# Altium PCB PCB1.PcbDoc
Units mm, origin at the board's own origin, x right, y up, seen from the top; angles counter-clockwise.
Board outline 127 x 101.6 mm, 3 copper layers (Top Layer, Internal Plane 1, Bottom Layer), stack 0.427 mm thick; 32 components, 32 nets, 124 pads, 9 vias.
Unrouted connection lines stored in the file: 86.
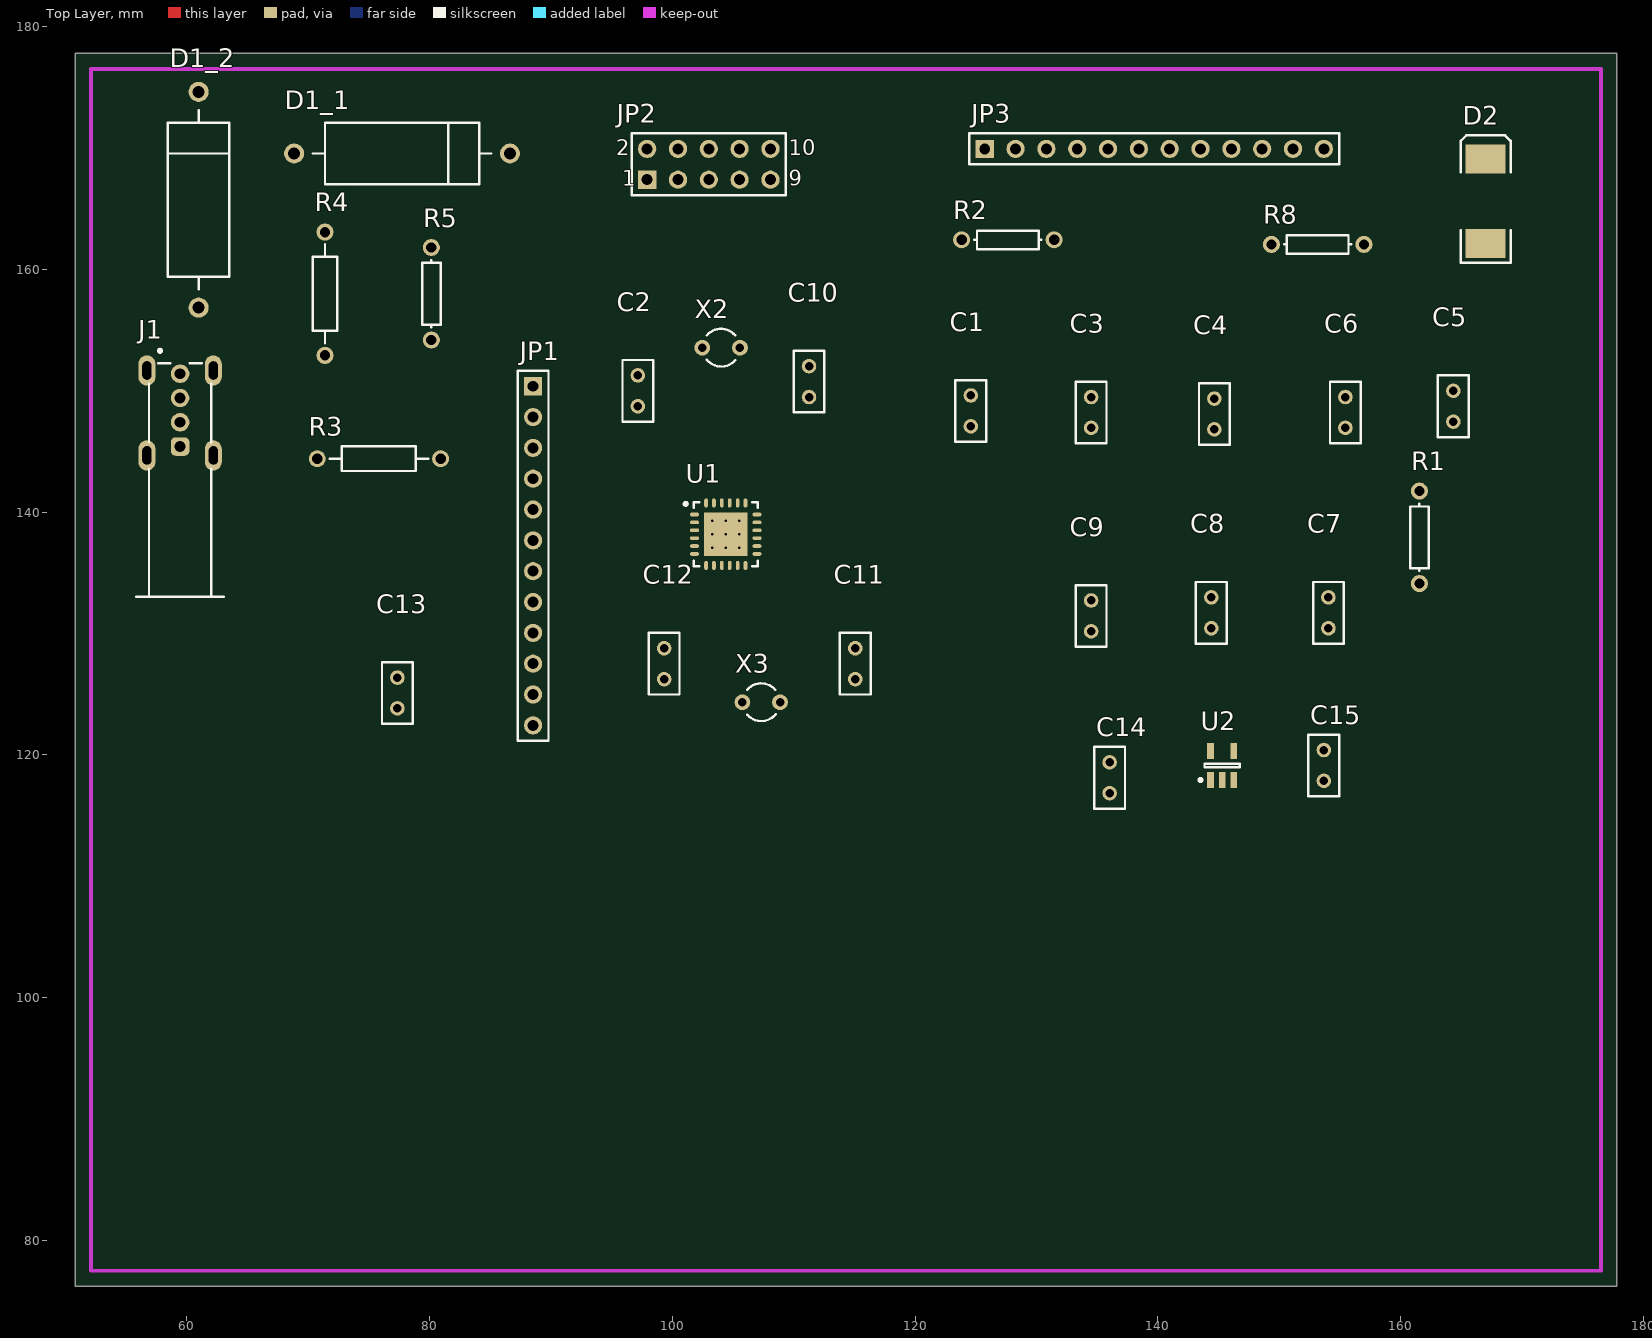
[diagram p0: Top Layer view]
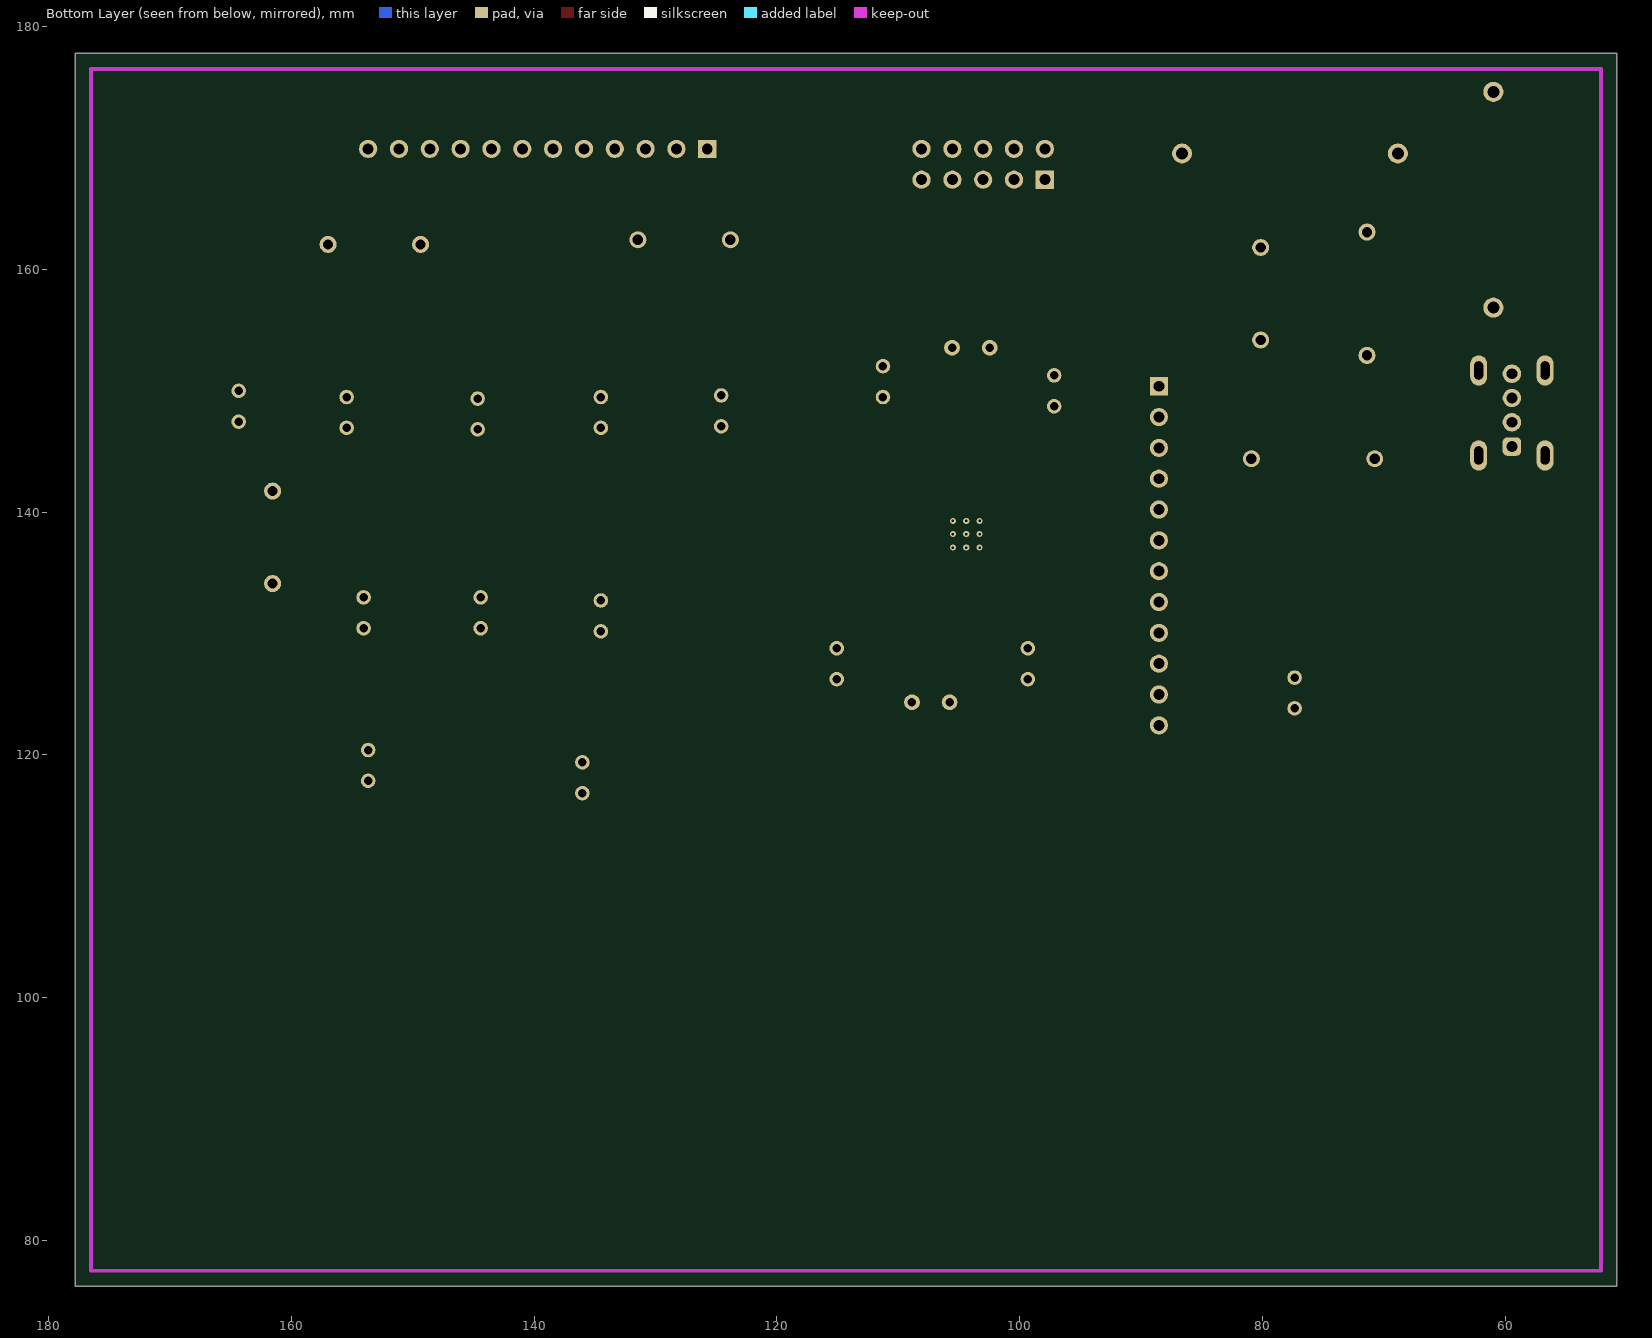
[diagram p1: Bottom Layer view, seen from below]
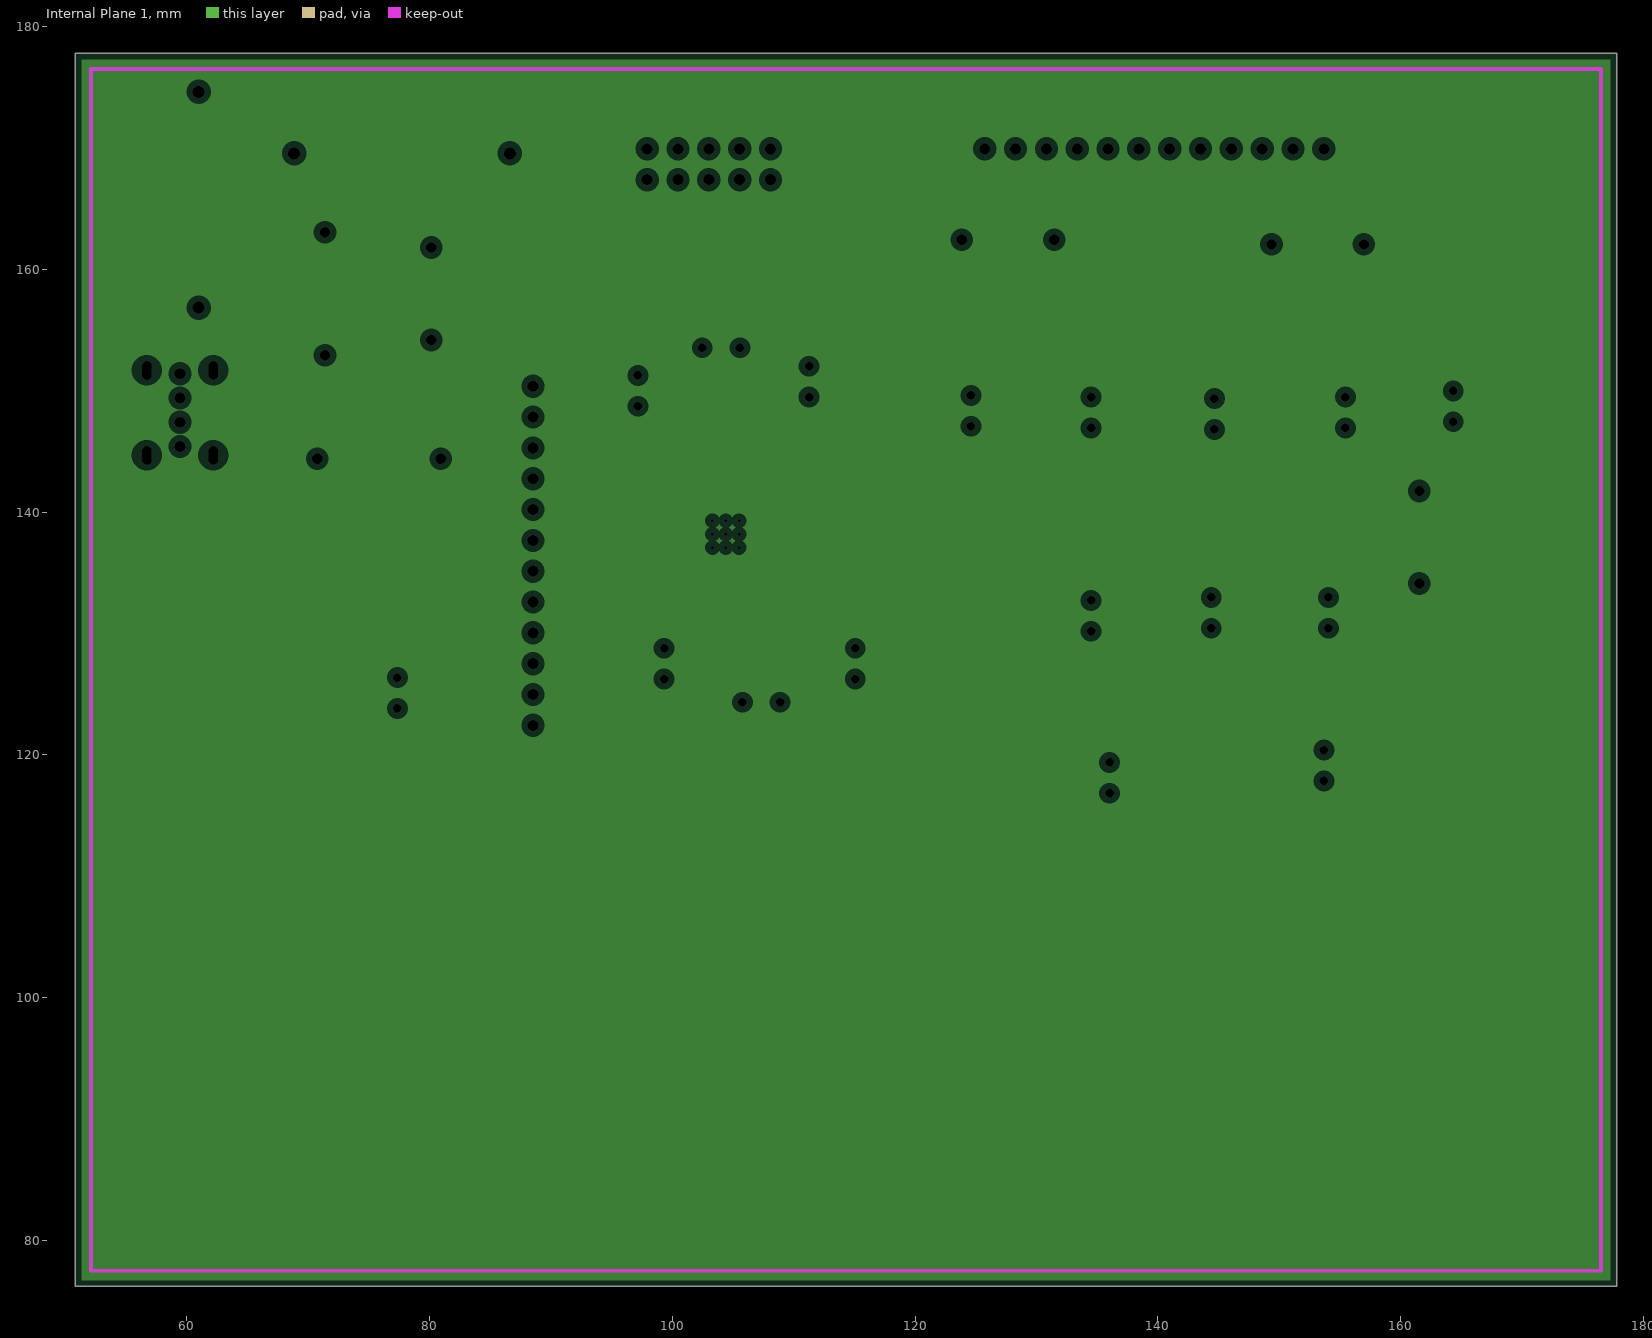
[diagram p2: Internal Plane 1, clearances drawn from the general rule]

## Layer stack, top to bottom
Top Solder: solder mask 0.0102, Solder Resist, Dk 3.5
Top Layer: signal copper 0.0356
Internal Plane 1: plane copper 0.0356
Dielectric 1: dielectric 0.32, FR-4, Dk 4.8
Bottom Layer: signal copper 0.0356
Bottom Solder: solder mask 0.0102, Solder Resist, Dk 3.5

## Board outline
50.8,76.2 177.8,76.2 177.8,177.8 50.8,177.8

## Design rules (kind name [scope] priority, off if disabled: settings)
Clearance [All] p1: gap=0.3
PlaneClearance [All] p1: clearance=0.508
PlaneConnect [All] p1: planeconnectstyle=Relief reliefexpansion=0.508 reliefentries=4 reliefconductorwidth=0.254 reliefairgap=0.254
PolygonConnect [All] p1: connectstyle=Relief reliefconductorwidth=0.254 reliefentries=4 polygonreliefangle="90 Angle" airgapwidth=0.254
RoutingVias [All] p1: holewidth=0.8 width=1.6 viastyle="Through Hole" minholewidth=0.711 minwidth=1.27 maxholewidth=0.711 maxwidth=1.27
SolderMaskExpansion [All] p1: expansion=0.102
UnpouredPolygon [All] p1: allowunpoured=FALSE
Width [All] p1: maxlimit=0.3 minlimit=0.3 preferedwidth=0.3
27 further rules are at their usual default settings.

## Components (designator, comment, footprint, x,y, rotation, side; value= is the part's Value field where it differs from the comment)
C1 "Cap" RAD-0.1 124.587,148.336 r90 top
C2 "Cap" RAD-0.1 97.155,149.987 r90 top
C3 "Cap" RAD-0.1 134.493,148.209 r90 top
C4 "Cap" RAD-0.1 144.653,148.082 r90 top
C5 "Cap" RAD-0.1 164.338,148.717 r90 top
C6 "Cap" RAD-0.1 155.448,148.209 r90 top
C7 "Cap" RAD-0.1 154.051,131.699 r90 top
C8 "Cap" RAD-0.1 144.399,131.699 r90 top
C9 "Cap" RAD-0.1 134.493,131.445 r90 top
C10 "Cap" RAD-0.1 111.252,150.749 r90 top
C11 "Cap" RAD-0.1 115.062,127.508 r270 top
C12 "Cap" RAD-0.1 99.314,127.508 r270 top
C13 "Cap" RAD-0.1 77.343,125.095 r90 top
C14 "Cap" RAD-0.1 136.017,118.11 r90 top
C15 "Cap" RAD-0.1 153.67,119.126 r90 top
D1_1 "D Zener" DIODE-0.7 77.724,169.545 r0 top
D1_2 "D Zener" DIODE-0.7 60.96,165.735 r90 top
D2 "Diode" SMC 167.005,165.608 r90 top
J1 "48204-0001" MOLX-48204-0001_V 59.436,137.668 r0 top
JP1 "Header 12" HDR1X12 88.519,150.368 r270 top
JP2 "Header 5X2" HDR2X5 97.917,167.386 r0 top
JP3 "Header 12" HDR1X12 125.73,169.926 r0 top
R1 "Res1 10K" AXIAL-0.3 161.544,137.922 r90 top
R2 "Res1" AXIAL-0.3 127.635,162.433 r0 top
R3 "USB SPEC" AXIAL-0.4 75.819,144.399 r0 top
R4 "USB SPEC" AXIAL-0.4 71.374,157.988 r90 top
R5 "1.5K" AXIAL-0.3 80.137,157.988 r90 top
R8 "390" AXIAL-0.3 153.162,162.052 r0 top
U1 "EFM32ZG108F16-QFN24" ENMR-QFN24_M 104.394,138.176 r0 top
U2 "LT1761ES5-3.3#TRMPBF" LT-S5-5-TSOT-23_N 145.288,119.126 r90 top
X2 "XTAL" R38 104.013,153.543 r270 top
X3 "XTAL" R38 107.315,124.333 r90 top

## Footprints (in the part's own frame and the unit in brackets; to place one, negate y for a bottom-side part, rotate by r counter-clockwise, add the part's x,y. Pads: shape width x height; smd on the part's side, far side on the other; paste and mask are expansions set on the pad)
AXIAL-0.3 [mm] "Axial Device, Thru-Hole; 2 Leads; 0.3 in Pin Spacing"
  round 1.4 hole 0.85: 1(-3.81,0) 2(3.81,0)
  silkscreen extent -2.77,-0.76 2.77,0.76
AXIAL-0.4 [mm] "Axial Device, Thru-Hole; 2 Leads; 0.4 in Pin Spacing"
  round 1.4 hole 0.85: 1(-5.08,0) 2(5.08,0)
  silkscreen extent -4.06,-1.02 4.06,1.02
DIODE-0.7 [mm] "Diode, Thru-Hole; 2 Leads; 0.7 in Pin Spacing"
  round 1.65 hole 1: 1(-8.89,0) 2(8.89,0)
  silkscreen extent -7.37,-2.54 7.37,2.54
ENMR-QFN24_M [mm] "QFN, 24-Leads, Body 5x5mm, Pitch 0.65mm, Thermal Pad 3.6 x 3.6mm, IPC Low Density"
  rect 3.6x3.6 smd: 0(0,0)
  oval 0.75x0.3 smd: 1(-2.575,1.625) 2(-2.575,0.975) 3(-2.575,0.325) 4(-2.575,-0.325) 5(-2.575,-0.975) 6(-2.575,-1.625) 13(2.575,-1.625) 14(2.575,-0.975) 15(2.575,-0.325) 16(2.575,0.325) 17(2.575,0.975) 18(2.575,1.625)
  oval 0.3x0.75 smd: 7(-1.625,-2.575) 8(-0.975,-2.575) 9(-0.325,-2.575) 10(0.325,-2.575) 11(0.975,-2.575) 12(1.625,-2.575) 19(1.625,2.575) 20(0.975,2.575) 21(0.325,2.575) 22(-0.325,2.575) 23(-0.975,2.575) 24(-1.625,2.575)
  silkscreen extent -3.42,-2.65 2.65,2.65, body extent -2.5,-2.5 2.5,2.5, height 0.9
HDR1X12 [mm] "Connector; Header; 12 Position"
  rect 1.5x1.5 hole 0.9: 1(0,0)
  round 1.5 hole 0.9: 2(2.54,0) 3(5.08,0) 4(7.62,0) 5(10.16,0) 6(12.7,0) 7(15.24,0) 8(17.78,0) 9(20.32,0) 10(22.86,0) 11(25.4,0) 12(27.94,0)
  silkscreen extent -1.27,-1.27 29.21,1.27
HDR2X5 [mm] "Connector; Header; 5x2 Position"
  rect 1.5x1.5 hole 0.9: 1(0,0)
  round 1.5 hole 0.9: 2(0,2.54) 3(2.54,0) 4(2.54,2.54) 5(5.08,0) 6(5.08,2.54) 7(7.62,0) 8(7.62,2.54) 9(10.16,0) 10(10.16,2.54)
  silkscreen extent -1.27,-1.27 11.43,3.81
LT-S5-5-TSOT-23_N [mm] "SOT23, 5-Leads, Body 2.90x1.63mm, Pitch 0.95mm, IPC Medium Density"
  rect 1.3x0.55 smd: 1(-1.2,0.95) 2(-1.2,0) 3(-1.2,-0.95) 4(1.2,-0.95) 5(1.2,0.95)
  silkscreen extent -1.32,-1.45 0.15,1.9, body extent -0.87,-1.45 0.87,1.45, height 1
MOLX-48204-0001_V [mm] "USB Type-A Up-Right Reverse Connector"
  rrect50% 1.52x1.52 hole 0.9: 1(0,7.73)
  round 1.52 hole 0.9: 2(0,9.73) 3(0,11.73) 4(0,13.73)
  oval 1.4x2.5 hole 0.75 slot 1.5 at 90 deg: MH1(-2.735,7) MH2(2.735,7) MH3(-2.735,14) MH4(2.735,14)
  silkscreen extent -3.6,-4.64 3.6,15.75, body extent -3.61,-4.71 3.59,14.54, height 14.68
R38 [mm] "Crystal, Thru-Hole; 2 Leads; Body 3.1 x 8.2 mm (Dia.xH)"
  round 1.3 hole 0.7: 1(0,1.55) 2(0,-1.55)
  silkscreen extent -1.55,-1.19 1.55,1.17
RAD-0.1 [mm] "Radial Cap, Thru-Hole; 2 Leads; 0.1 in Pin Spacing"
  round 1.2 hole 0.7: 1(-1.27,0) 2(1.27,0)
  silkscreen extent -2.54,-1.27 2.54,1.27
SMC [mm] "DO-214-AB/SMC; 2 C-Bend Leads; Body 7.9 x 5.9 mm, inc. leads (LxW)"
  rect 2.4x3.3 smd: 1(-3.475,0) 2(3.475,0)
  silkscreen extent -5.07,-2.05 5.43,2.05

## Part data
C1 C2 C3 C4 C5 C6 C7 C8 C9 C10 C11 C12 C13 C14 C15: "Capacitor"
D1_1 D1_2: "Zener Diode"
D2: "Default Diode"
J1: library part CMP-0411-00001-1, "USB Shielded I/O Receptacle, Type A"
JP1 JP3: "Header, 12-Pin"
JP2: "Header, 5-Pin, Dual row"
R1 R5 R8: library part Res1, "Resistor"
R2: "Resistor"
R3 R4: library part Res2, "Resistor"
U1: library part CMP-0270-00117-1, "EFM32 Zero Gecko, M0+ ARM Cortex CPU, 16 KB Flash, 4 KB RAM, 1.85 - 3.8 V Supply, 32 MHz Max Speed, -40 to 85 degC, 24-Pin QFN, RoHS Compliant"
U2: library part CMP-0476-01224-1, "100 mA, Low Noise, LDO Micropower Regulator, 1.8 to 20 V Vin, 3.3 V Vout, 5-pin SOT23 (S5-5), -40 to 125 degC, Pb-Free, Mini Tape and Reel"
X2 X3: "Crystal Oscillator"

## Via types
v1: diameter 0.5, hole 0.2, Top Layer to Bottom Layer, 9 vias

## Nets (pads, with @x,y where several pads share a name; then routed paths per layer and width w, separated by ;. In a path a pad name is that pad's centre, name@x,y a point inside that pad or via, vN(x,y) a via of type N, cw(c..) or ccw(c..) an arc to the next point about the centre after c; other vN are vias at no path point)
GND: C1.1 C2.1 C3.1 C4.1 C5.1 C6.1 C7.1 C8.1 C9.1 C10.1 C11.1 C12.1 C13.1 C14.1 C15.1 D1_1.1 D1_2.1 D2.2 J1.4 JP1.11 JP2.3 JP2.5 JP2.9 JP3.2 JP3.12 U1.0 U2.2
  other v1: 103.294,137.076 104.394,137.076 105.494,137.076 103.294,138.176 104.394,138.176 105.494,138.176 103.294,139.276 104.394,139.276 105.494,139.276
NetC2_2: C2.2 X2.2
NetC5_2: C5.2 U1.16
NetC7_2: C7.2 C8.2 C9.2 R1.1 U1.9 U1.12
NetC10_2: C10.2 X2.1
NetC11_2: C11.2 X3.2
NetC12_2: C12.2 X3.1
NetC14_2: C14.2 J1.1 JP3.1 U2.1 U2.3
NetC15_2: C15.2 U2.4
NetD1_1_2: D1_1.2 JP1.4 R3.2 U1.4
NetD1_2_2: D1_2.2 JP1.3 R4.2 R5.1 U1.3
NetD2_1: D2.1 R8.2
NetJ1_2: J1.2 R4.1
NetJ1_3: J1.3 R3.1
NetJP1_2: JP1.2 R5.2 U1.1
NetJP1_5: JP1.5 U1.5
NetJP1_6: JP1.6 U1.6
NetJP1_7: JP1.7 JP2.10 R2.1 U1.7
NetJP1_8: JP1.8 U1.8
NetJP1_9: JP1.9 U1.10
NetJP1_10: JP1.10 U1.11
NetJP1_12: JP1.12
NetJP2_2: JP2.2 JP3.6 U1.20
NetJP2_4: JP2.4 JP3.7 U1.19
NetJP2_6: JP2.6 JP3.5 U1.21
NetJP3_3: JP3.3 U1.24
NetJP3_4: JP3.4 U1.23
NetJP3_8: JP3.8 U1.18
NetJP3_9: JP3.9 U1.17
NetJP3_10: JP3.10 R8.1 U1.14
NetJP3_11: JP3.11 U1.13
VDD: C1.2 C3.2 C4.2 C6.2 C13.2 JP1.1 JP2.1 R1.2 R2.2 U1.2 U1.15 U1.22 U2.5
pads on no net: J1.MH1 J1.MH2 J1.MH3 J1.MH4 JP2.7 JP2.8

## Keep-outs
Keep-Out Layer:
  lines w0.3: 52.1,77.5 176.5,77.5 176.5,176.5 52.1,176.5 52.1,77.5

## Text inside footprints (layer, text, board x,y; h text height)
J1: Mechanical 1 "PCB Edge" at 57.936,137.968 h0.4
JP2: Top Overlay "2" at 95.377,169.418 h1.27; Top Overlay "1" at 95.885,166.878 h1.27; Top Overlay "9" at 109.601,166.878 h1.27; Top Overlay "10" at 109.601,169.418 h1.27